# Altium PCB WDK-LED.PcbDoc
Units mil, origin at the board's own origin, x right, y up, seen from the top; angles counter-clockwise.
Board outline 1260 x 1260 mil, 2 copper layers (Top Layer, Bottom Layer); 26 components, 16 nets, 111 pads, 25 vias.
Unrouted connection lines stored in the file: 19.
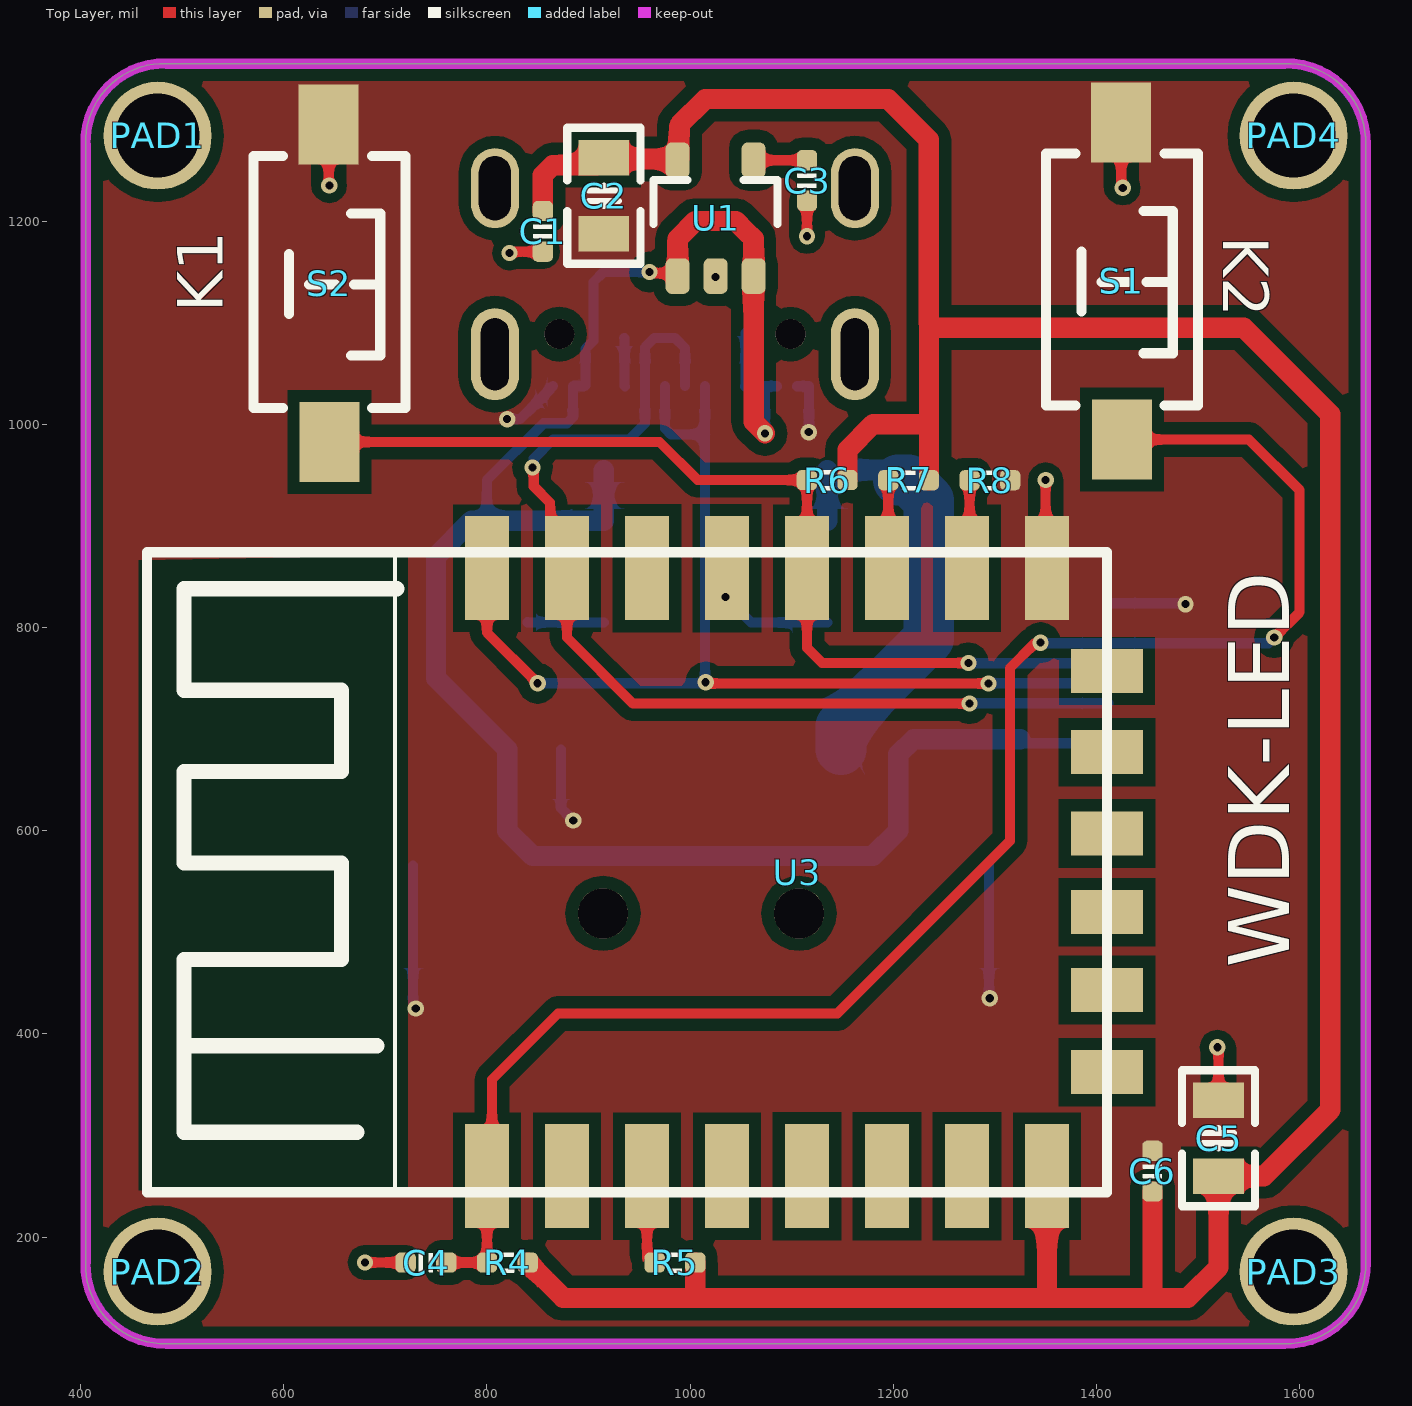
[diagram p0: Top Layer view]
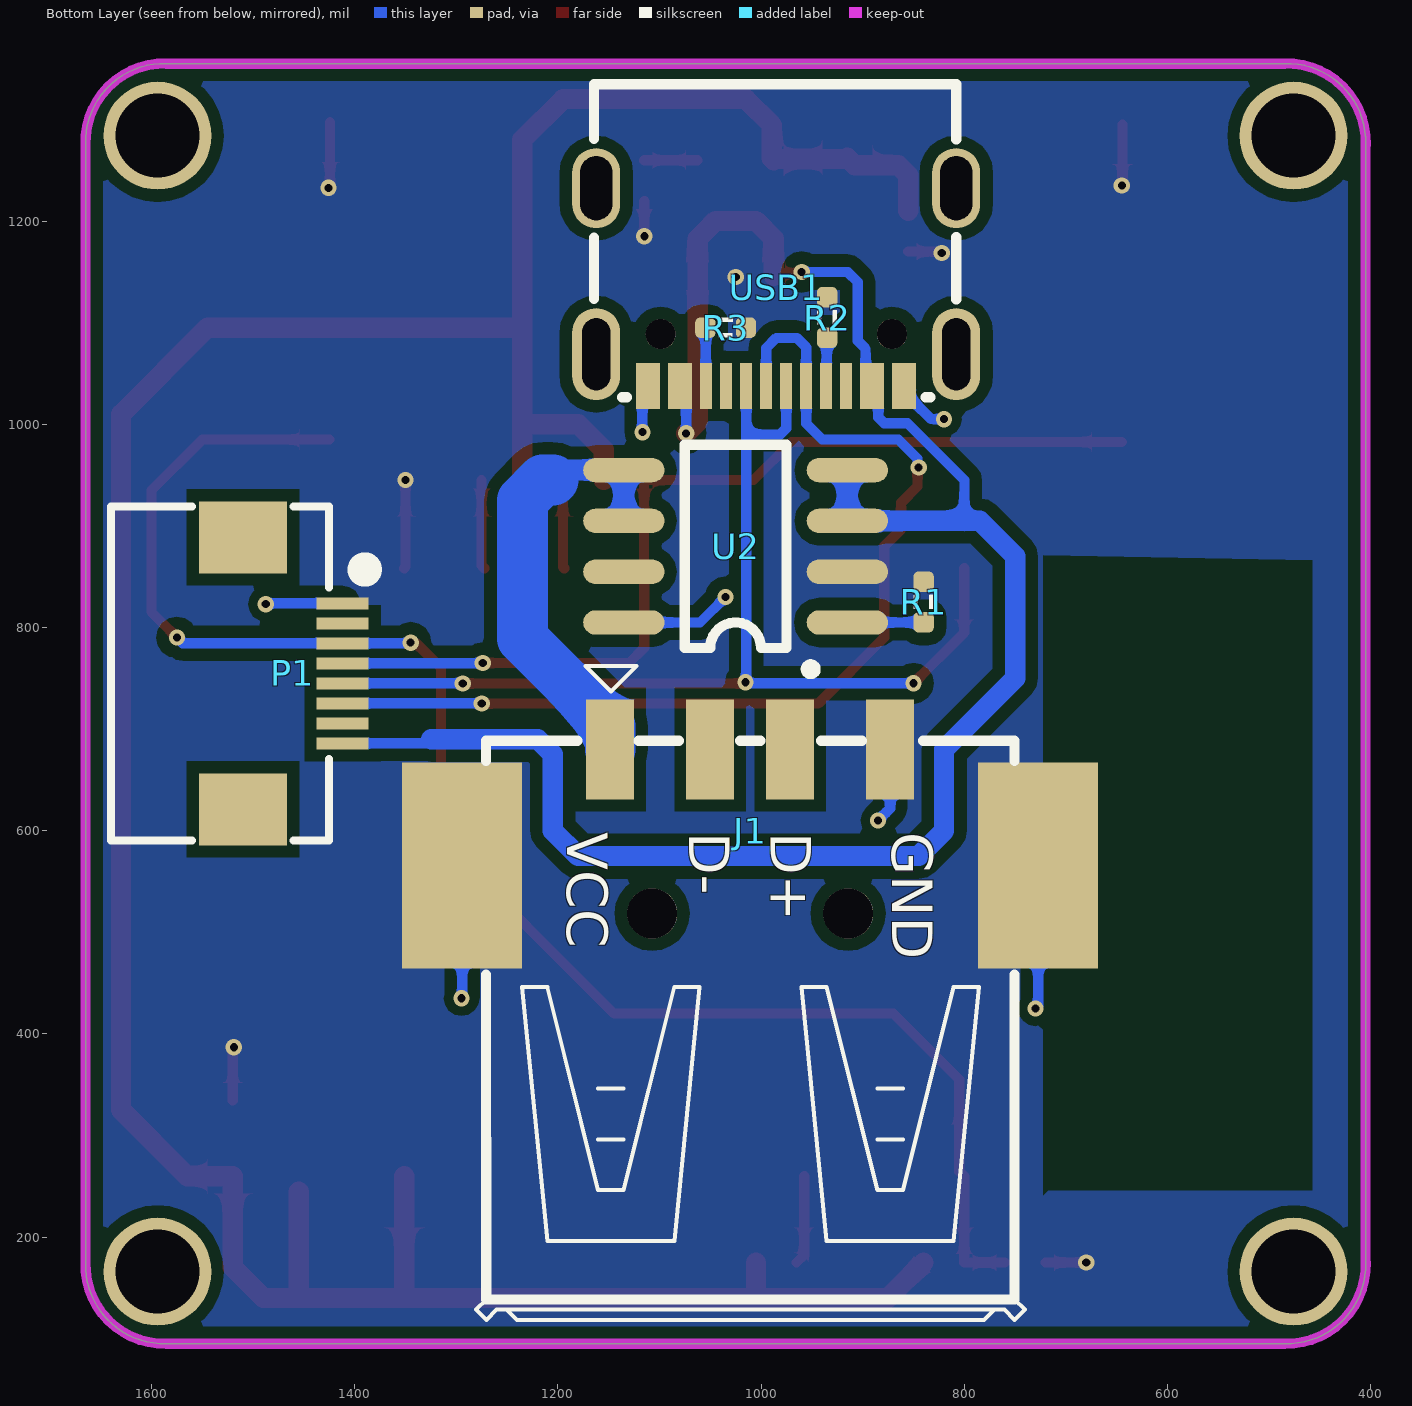
[diagram p1: Bottom Layer view, seen from below]
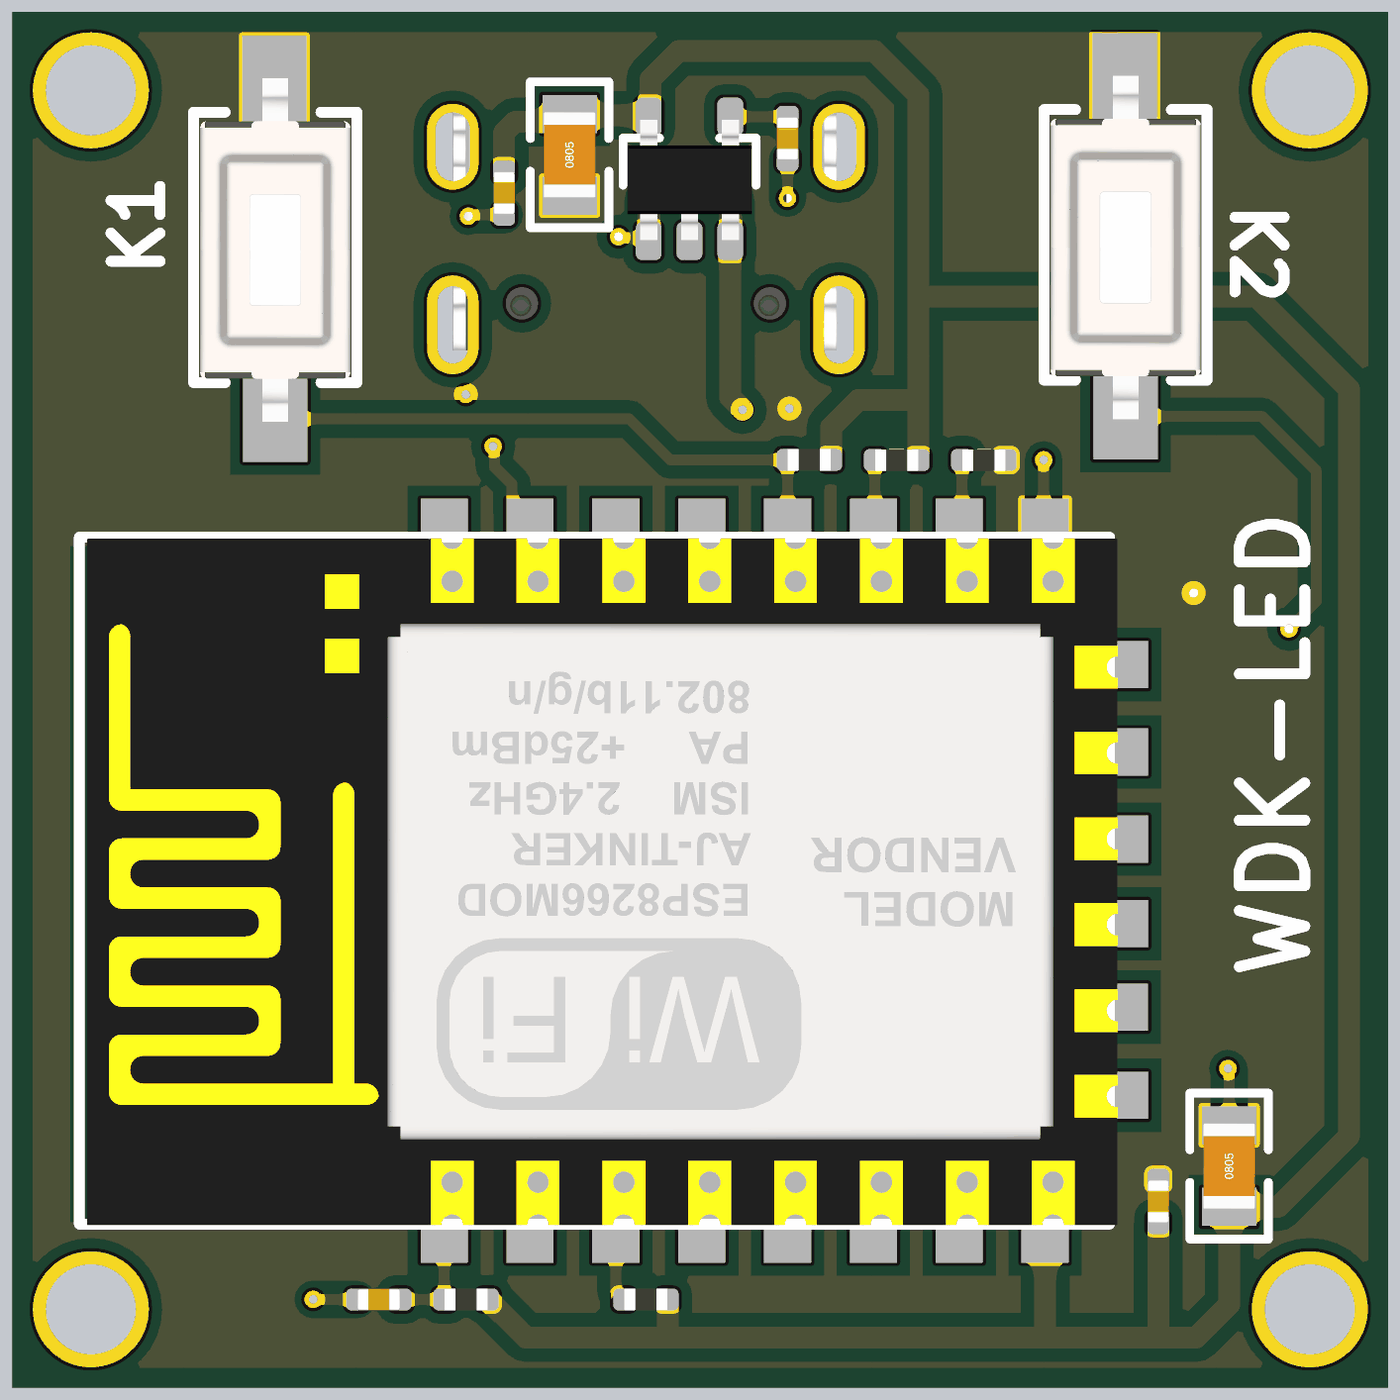
[diagram p2: 3D render of the assembled board from above, using the file's embedded part models]
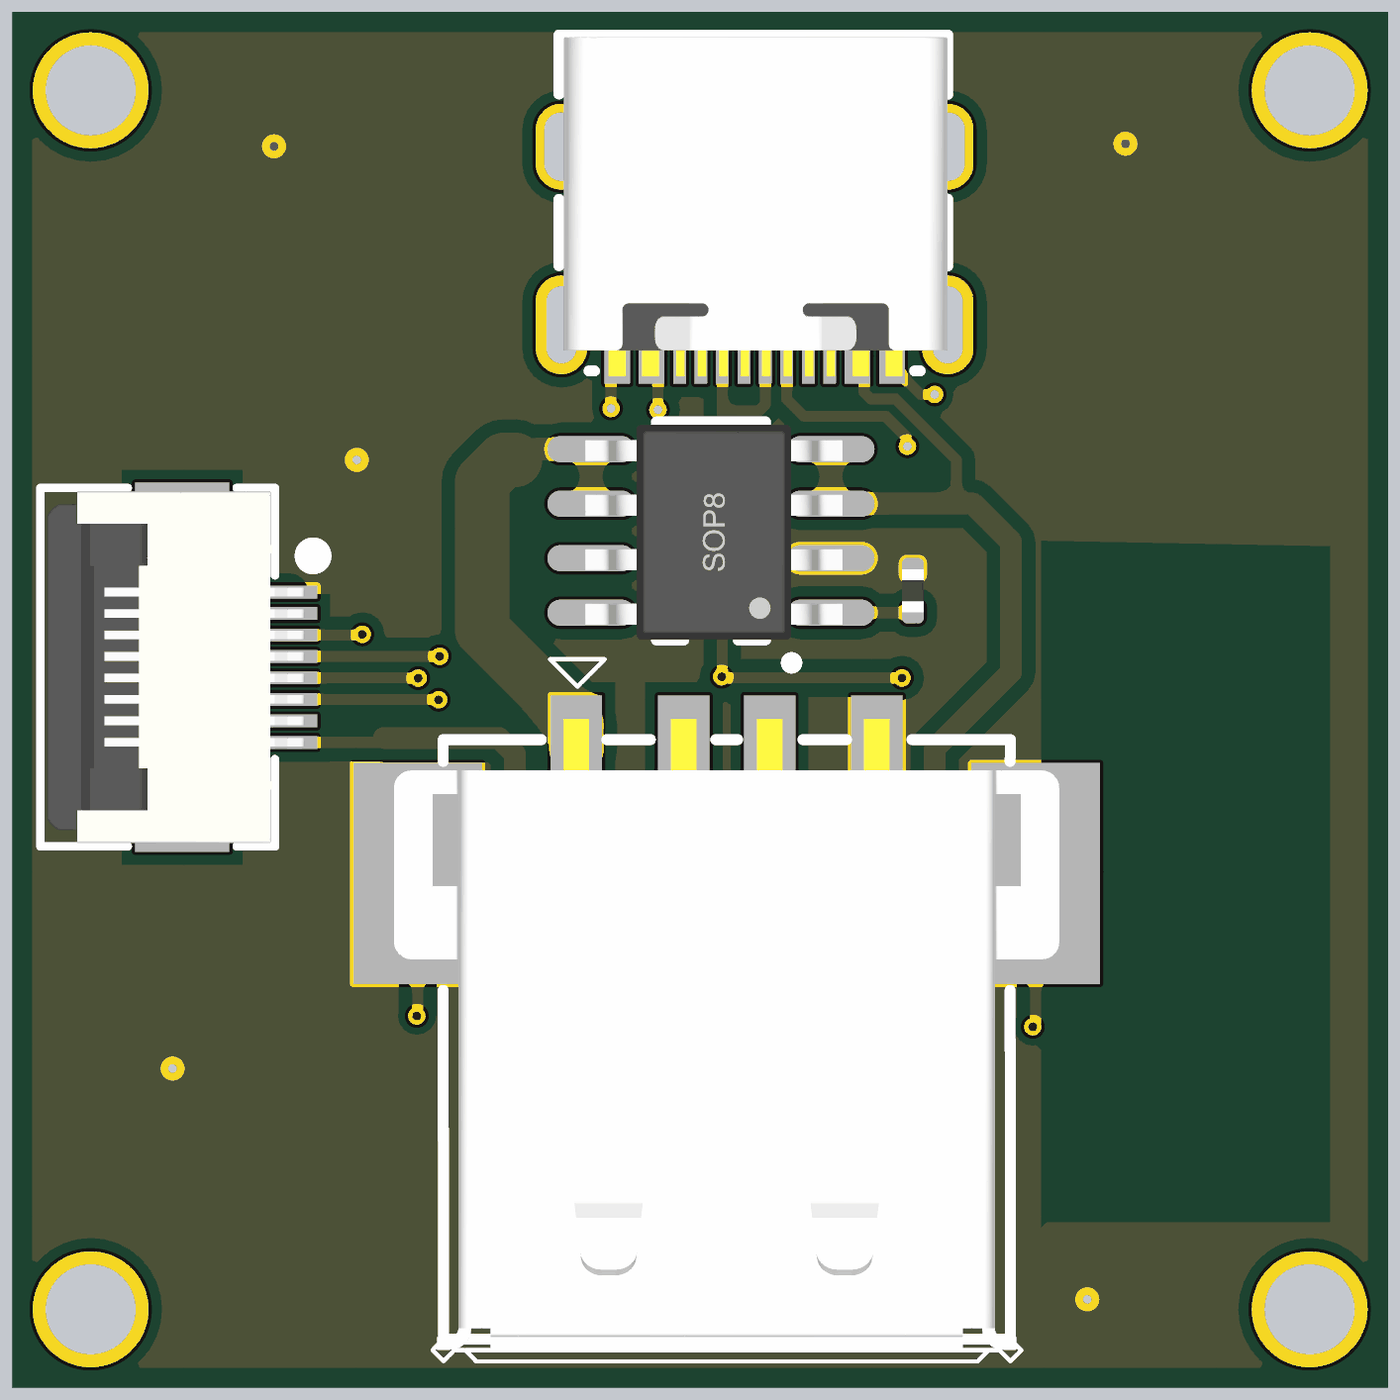
[diagram p3: 3D render of the assembled board from below, using the file's embedded part models]

## Layer stack, top to bottom
Top Solder: solder mask 0.4, Solder Resist, Dk 3.5
Top Layer: signal copper 1.4
Dielectric 1: dielectric 12.6, FR-4, Dk 4.8
Bottom Layer: signal copper 1.4
Bottom Solder: solder mask 0.4, Solder Resist, Dk 3.5

## Board outline
405,175 ccw(c482.5,172.5) 485,95 1585,95 ccw(c1587.5,172.5) 1665,175 1665,1275 ccw(c1587.5,1277.5) 1585,1355 1585,1354.84 485,1354.84 485,1355 ccw(c482.5,1277.5) 405,1275 405.16,1275

## Design rules (kind name [scope] priority, off if disabled: settings)
Clearance [All] p1: gap=6 ignorepadtopadclearanceinfootprint=FALSE
ComponentClearance [All] p1: gap=0 collisioncheckmode=3 verticalgap=0 showdistances=FALSE
DiffPairsRouting [All] p1: maxlimit=9 minlimit=9 mostfreqgap=9 toplayer_minwidth=4 toplayer_maxwidth=4 toplayer_prefwidth=4 bottomlayer_minwidth=4 bottomlayer_maxwidth=4 bottomlayer_prefwidth=4 maxuncoupledlength=500
FanoutControl Fanout_BGA [All] p1: bgadir=Out bgaviamode=Centered fanoutstyle=Auto fanoutdirection=Alternating viagrid=1 // Fanout_BGA (Default Rule)
HoleSize [All] p1: absolutevalues=TRUE maxlimit=10000 minlimit=8 maxpercent=80.000 minpercent=20.000
MinimumSolderMaskSliver [All] p1 off: minsoldermaskwidth=2
PlaneClearance [All] p1: clearance=8
PlaneConnect [All] p1: planeconnectstyle=Direct reliefexpansion=20 reliefentries=4 reliefconductorwidth=10 reliefairgap=10
PolygonConnect [All] p1: connectstyle=Direct reliefconductorwidth=10 reliefentries=4 polygonreliefangle="90 Angle" airgapwidth=10
RoutingVias [All] p1: holewidth=8 width=16 viastyle="Through Hole" minholewidth=6 minwidth=12 maxholewidth=28 maxwidth=50
SilkToSilkClearance [All] p1: silktosilkclearance=0
SilkToSolderMaskClearance [IsPad] p1: minsilkscreentomaskgap=0 clearancetoexposedcopper=TRUE
SolderMaskExpansion [All] p1: expansion=3 istentingtop=FALSE
Width [All] p1: maxlimit=10000 minlimit=4 preferedwidth=10
21 further rules are at their usual default settings.

## Classes and differential pairs
net class GND: GND
net class POWER: 3V3 5V

## Components (designator, comment, footprint, x,y, rotation, side; value= is the part's Value field where it differs from the comment)
C1 "0.1uF" CAP_0402 855.16,1189.84 r90 top value=0.1u
C2 "10uF" C0805_L 915.16,1224.84 r90 top value=0.1u
C3 "10nF" CAP_0402 1115.16,1239.84 r90 top value=0.1u
C4 "104" CAP_0402 740.16,174.84 r0 top
C5 "10uF" C0805_L 1520.15,297.25 r90 top
C6 "100nF" CAP_0402 1455.16,264.84 r90 top
J1 "USB-A" USB-A/S_C 1010.79,518.43 r180 bottom locked
P1 "DowmLoad" "FPC0.5 2H-WS-8P" 1510.16,754.84 r270 bottom
PAD1 "PAD" M2#1 475.16,1279.84 r90 top
PAD2 "PAD" M2#2 475.16,164.84 r90 top
PAD3 "PAD" M2#3 1595.16,174.84 r90 top
PAD4 "PAD" M2#4 1590.16,1284.84 r90 top
R1 "2K" RES_0402 840,825 r270 bottom
R2 "5.1K" RES_0402 935,1105 r270 bottom value=22R
R3 "5.1K" RES_0402 1035,1095 r0 bottom value=22R
R4 "10K" RES_0402 820.16,174.84 r0 top
R5 "10K" RES_0402 985.16,174.84 r180 top
R6 "10K" RES_0402 1135,945 r0 top
R7 "10K" RES_0402 1215.16,944.84 r0 top
R8 "10K" RES_0402 1295.16,944.84 r180 top
S1 "SW-PB" "SW SMD-3*6*2.5" 1425.16,1139.84 r270 top
S2 "SW-PB" "SW SMD-3*6*2.5" 645.16,1137.53 r270 top
U1 "LP2992 3V3" SOT23-5 1025.16,1204.84 r90 top
U2 "cn5711" SOP8 916.16,803.84 r0 bottom locked
U3 "ESP-12F" ESP-12F 1060.16,394.84 r90 top locked
USB1 "Type-C" USB-C-SMD_16P 985.16,1134.84 r180 bottom locked

## Footprints (in the part's own frame and the unit in brackets; to place one, negate y for a bottom-side part, rotate by r counter-clockwise, add the part's x,y. Pads: shape width x height; smd on the part's side, far side on the other; paste and mask are expansions set on the pad)
C0805_L [mil] "无极性贴片电容"
  rect 35x50 smd: 1(-37.4,0) 2(37.4,0)
  silkscreen extent -67,-36 67,36, body extent -39,-24 39,24, height 22
CAP_0402 [mil]
  rrect50% 20x20 smd: 1(-20,0) 2(20,0)
  silkscreen extent -7,-9 7,9, body extent -20,-10 20,10, height 20
ESP-12F [mm]
  rect 2.6x1.1 smd: 1(-3.429,6.604) 2(-3.429,4.604) 3(-3.429,2.604) 4(-3.429,0.604) 5(-3.429,-1.396) 6(-3.429,-3.396) 7(-3.429,-5.396) 8(-3.429,-7.396) 15(11.771,-7.396) 16(11.771,-5.396) 17(11.771,-3.396) 18(11.771,-1.396) 19(11.771,0.604) 20(11.771,2.604) 21(11.771,4.604) 22(11.771,6.604)
  rect 1.1x1.8 smd: 9(-0.829,-8.896) 10(1.225,-8.893) 11(3.171,-8.896) 12(5.14,-8.896) 13(7.171,-8.896) 14(9.204,-8.896)
  silkscreen extent -3.83,-8.9 12.17,15.1, body extent -3.86,-9.09 12.15,14.92, height 2.65
"FPC0.5 2H-WS-8P" [mm] "长：8.2mm，宽：5.2mm，高：2mm 淘宝ID:黄晶宝石   店铺网址:https://shop463601444.taobao.com"
  rect 1.8x2.2 smd: 0(-3.4,0) 0(3.4,0)
  rect 0.3x1.3 smd: 1(-1.75,2.497) 2(-1.25,2.497) 3(-0.75,2.497) 4(-0.25,2.497) 5(0.25,2.497) 6(0.75,2.497) 7(1.25,2.497) 8(1.75,2.497)
  silkscreen extent -4.17,-3.3 4.17,3.23, body extent -4.1,-3.15 4.1,2.85, height 2
M2#1 [mm]
  round 2.7 hole 2.1: 1(0.105,-0.022)
M2#2 [mm]
  round 2.7 hole 2.1: 1(0.026,-0.022)
M2#3 [mm]
  round 2.7 hole 2.1: 1(-0.228,0.026)
M2#4 [mm]
  round 2.7 hole 2.1: 1(-0.022,-0.101)
RES_0402 [mil]
  rrect50% 20x20 smd: 1(-20,0) 2(20,0)
  silkscreen extent -7,-10 7,10, body extent -20,-10 20,10, height 14
SOP8 [mil]
  oval 80x24 smd: 1(-1,-1) 2(-1,-51) 3(-1,-101) 4(-1,-151) 5(219,-151) 6(219,-101) 7(219,-51) 8(219,-1)
  silkscreen extent 30,-176 159,50, body extent -12,-173 225,24, height 75
SOT23-5 [mm]
  rrect50% 0.889x0.6 smd: 1(-1.5,0.95) 2(-1.5,0) 3(-1.5,-0.95) 4(1.396,-0.95) 5(1.396,0.95)
  silkscreen extent -0.2,-1.55 0.9,1.55, body extent -1.48,-1.45 1.32,1.45, height 1.2
"SW SMD-3*6*2.5" [mm] "3*6*2.5mm"
  rect 2x1.5 smd: 1(-3.996,-0.02) 2(3.937,0)
  silkscreen extent -3.21,-1.9 3.09,1.9, body extent -4,-1.75 4,1.75, height 2.59
USB-A/S_C [mm] "A型贴片母头， 淘宝ID:黄晶宝石"
  rect 1.2x2.5 smd: 1(-3.5,4.1) 2(-1,4.1) 3(1,4.1) 4(3.5,4.1)
  rect 3x5.15 smd: 4(-7.2,1.2) 4(7.2,1.2)
  round 1.25 hole 1.25 unplated: 7(-2.45,0) 8(2.45,0)
  silkscreen extent -6.85,-10.17 6.86,6.19, body extent -7.75,-9.9 7.75,4.8, height 7.4
USB-C-SMD_16P [mm] "封装库来自淘宝ID:黄晶宝石"
  oval 1.2x2.3 hole 0.7 slot 1.8 at 90 deg: 0(-4.5,-1.675) 0(4.5,-1.675)
  oval 1.2x2 hole 0.8 slot 1.6 at 90 deg: 0(-4.5,2.475) 0(4.5,2.475)
  rect 0.3x1.15 smd: A1(3.35,-2.473) A4(2.55,-2.471) A5(1.25,-2.475) A6(0.25,-2.475) A7(-0.25,-2.473) A9(-2.55,-2.475) A12(-3.35,-2.475) B1(-3.05,-2.475) B4(-2.25,-2.475) B5(-1.75,-2.475) B6(-0.75,-2.475) B7(0.75,-2.473) B9(2.25,-2.471) B12(3.05,-2.473)
  rect 0.3x1.148 smd: A8(1.75,-2.475) B8(-1.25,-2.475)
  round 0.75 hole 0.75 unplated: ""(-2.89,-1.175) ""(2.89,-1.175)
  silkscreen extent -4.56,-2.75 4.5,5.08, body extent -4.44,-2.87 4.5,5.03, height 3.25

## Part data
C1 C2 C3: library part 电容-0402, "Capacitor"
C4 C5 C6: library part C, "无极性贴片电容", BOM名称=无极性贴片电容, 学习资源=www.ooocke.com, 版权归属=源创客
J1: library part USB, "USB接口"
P1: library part "Header 8", "Header, 8-Pin", LatestRevisionDate=17-Jul-2002, LatestRevisionNote="Re-released for DXP Platform.", Publisher="Altium Limited"
PAD1 PAD2 PAD3 PAD4: "M2通孔"
R1 R4 R5 R6 R7 R8: library part R, "贴片电阻", BOM名称=贴片电阻, 学习资源=www.ooocke.com, 版权归属=源创客
R2 R3: library part 电阻-0402, "Resistor"
S1 S2: "微动开关", LatestRevisionDate=17-Jul-2002, LatestRevisionNote="Re-released for DXP Platform.", PackageReference=SPST-2, Published=24-Mar-1999, Publisher="Altium Limited"
U1: library part LP2992, "LDO"
U3: Manufacturer=安信可, Price=12.27
USB1: library part USB-Type-C-TOP

## Via types
v1: diameter 16, hole 8, Top Layer to Bottom Layer, 25 vias

## Nets (pads, with @x,y where several pads share a name; then routed paths per layer and width w, separated by ;. In a path a pad name is that pad's centre, name@x,y a point inside that pad or via, vN(x,y) a via of type N, cw(c..) or ccw(c..) an arc to the next point about the centre after c; other vN are vias at no path point)
3V3: C1.2 C2.2 C5.1 C6.1 R4.2 R5.1 R6.2 R7.2 U1.5 U3.8 | length 3248.4
  Top Layer w20: R4.2 875,140 1010,140 ; C1.2 855.16,1244.84 855,1245 865,1255 907.92,1255 C2.2 916.39,1261.01 986.53,1261.01 U1.5 989.57,1261.6 989.57,1294.57 1015,1320 1195,1320 1235,1280 1235,1100 1235.16,1099.84 ; R5.1 1005.16,144.84 1010,140 ; R6.2 1155,975 1180,1000 1230,1000 ; R7.2 1235.16,1099.84 ; U3.8 1351.34,143.66 1355,140 ; C6.1 1455.16,140.16 1455,140 ; 1010,140 1355,140 ; 1235.16,1099.84 1240,1095 1545,1095 1630,1010 1630,325 1564.84,259.84 C5.1 1520.16,170.16 1490,140 1455,140 ; 1355,140 1455,140
5V: P1.8 U1.1 U1.3 U2.3 U2.4 USB1.A4 USB1.A9 USB1.B4 USB1.B9 | length 1992
  Top Layer w10: v1(960.13,1149.71) 961.28,1148.56 984.98,1148.56 U1.1
  Top Layer w20: U1.1 987.76,1182.76 1005,1200 1045,1200 1054.97,1190.03 1062.56,1182.44 U1.3 1062.56,1002.22 v1(1073.8,990.98)
  Bottom Layer w10: 800,904.84 800,945 856,1001 878.91,1001 884.76,1006.86 USB1.A4 USB1.B9 897.15,1038.14 897.15,1074.14 905,1082 905,1140 914.71,1149.71 v1(960.13,1149.71) ; v1(1073.8,990.98) 1073.8,1037.35 USB1.B4 USB1.A9 ; 1325,690 1329.06,685.94 P1.8
  Bottom Layer w20: U2.4 U2.3 800,904.84 784.84,904.84 750,870 750,750 820,680 820,600 845,575 1180,575 1205,600 1205,675 1220,690 1325,690
EN: C4.2 P1.3 R4.1 S1.2 U3.1 | length 1623.3
  Top Layer w10: C4.2 R4.1 U3.1 805,264.69 805,355 870,420 1145,420 1315,590 1315,760 1338.85,783.85 1343.85,783.85 v1(1345,785) ; S1.2 1550.16,984.84 1600,935 1600,815 v1(1575,790)
  Bottom Layer w10: v1(1345,785) 1345.63,784.37 P1.3 1569.37,784.37 v1(1575,790)
GND: C1.1 C2.1 C3.1 C4.1 C5.2 C6.2 J1.4 P1.1 R1.1 R2.1 R3.1 R8.1 S1.1 S2.1 U1.2 U2.2 U3.15 USB1.A1 USB1.A12 USB1.B1 USB1.B12 | length 913.9
  Top Layer w10: S2.1 644.37,1235.63 v1(645,1235) ; v1(680,175) 680.16,174.84 C4.1 ; v1(822.29,1168.47) 823.66,1169.84 C1.1 ; v1(1025,1145) 1025.16,1145.16 U1.2 ; v1(1115,1185) 1115.08,1185.08 1115.08,1219.76 C3.1 ; v1(1350,945) 1350,859.61 U3.15 ; S1.1 1424.37,1234.16 v1(1425.92,1232.61) ; v1(1519.01,386.72) 1520.16,385.56 C5.2
  Bottom Layer w10: J1.4@727.32,565.67 727.32,427.68 v1(730,425) ; v1(820,1005) 832.61,1005 USB1.B12 ; J1.4@872.99,679.84 872.99,622.01 v1(885,610) ; USB1.B1 USB1.A12 1117.05,992.39 v1(1116.82,992.16) ; J1.4@1294.25,565.67 1294.25,435.75 v1(1295,435) ; P1.1 1486.75,823.74 v1(1487.57,822.91)
GPIO0: P1.4 R6.1 S2.2 U3.18 | length 953.6
  Top Layer w10: S2.2 970,982.53 1007.53,945 R6.1 1115.16,944.84 1115.16,858.31 U3.18 1115.12,779.88 1130,765 1270,765 1270.14,764.86 v1(1273.97,764.86)
  Bottom Layer w10: v1(1273.97,764.86) 1274.06,764.77 1411.76,764.77 P1.4
GPIO4: U2.8 U3.19 | length 110.6
  Bottom Layer w10: v1(1035,830) 1060.16,804.84 U2.8
LED+: J1.1 U2.5 U2.6 | length 419.2
  Bottom Layer w20: U2.6 U2.5 ; U2.5@1160.16,955.16 1210.16,955.16
  Bottom Layer w50: J1.1 1148.58,702.68 1235,789.09 1235,925 1215,945 1205,945
NetC3_2: C3.2 U1.4 | length 52.6
  Top Layer w10: U1.4@1062.59,1259.81 C3.2
NetR1_2: R1.2 U2.1 | length 75.2
  Bottom Layer w10: R1.2 840.08,804.92 915.08,804.92 U2.1
NetR2_2: R2.2 USB1.A5 | length 48
  Bottom Layer w10: R2.2 935.47,1084.53 935.47,1037.87 USB1.A5
NetR3_2: R3.2 USB1.B5 | length 53
  Bottom Layer w10: USB1.B5 1054.53,1037.88 1054.53,1089.53 R3.2@1055,1090
NetR5_2: R5.2 U3.3 | length 88.1
  Top Layer w10: U3.3 957.64,182.36 R5.2
NetR7_1: R7.1 U3.17 | length 87.1
  Top Layer w10: U3.17 1195.16,859.57 R7.1
NetR8_2: R8.2 U3.16 | length 87.6
  Top Layer w10: U3.16 1275.16,860.83 R8.2
RXD: P1.6 U3.21 USB1.A7 USB1.B7 | length 1034.4
  Top Layer w10: v1(845,957.5) 846.15,956.35 846.15,938.85 862.24,922.76 862.24,896.65 878.9,880 U3.21 878.9,790 943.9,725 v1(1275,725)
  Bottom Layer w10: v1(845,957.5) 846.15,958.65 846.15,966.15 865,985 940,985 955.63,1000.63 USB1.B7 955.63,1075.63 965,1085 985,1085 995,1075 USB1.A7 ; v1(1275,725) 1275.31,725.31 P1.6
TXD: P1.5 U3.22 USB1.A6 USB1.B6 | length 1070.7
  Top Layer w10: U3.22 800.16,794.84 v1(850,745) ; v1(1015.35,746.06) 1016.57,744.84 v1(1293.73,744.84)
  Bottom Layer w10: v1(850,745) v1@1015,745 ; USB1.A6 975.31,995.86 981.17,990 1014.69,990 ; v1@1014.69,746.06 1014.69,990 ; USB1.B6 1014.69,990 ; v1(1293.73,744.84) 1293.89,745 P1.5
pads on no net: J1.2 J1.3 J1.7 J1.8 P1.0 P1.2 P1.7 PAD1.1 PAD2.1 PAD3.1 PAD4.1 U2.7 U3.2 U3.4 U3.5 U3.6 U3.7 U3.9 U3.10 U3.11 U3.12 U3.13 U3.14 U3.20 USB1. USB1.0 USB1.A8 USB1.B8

## Polygon pours and split planes (outlines as drawn)
GND on Bottom Layer "GND_L02_P000" (solid, pour order 0): 405,1355 1665,1355 1665,95 405,95
GND on Top Layer "GND_L01_P001" (solid, pour order 1): 405,1355 1665,1355 1665,95 405,95

## Keep-outs
Keep-Out Layer:
  lines w10: 405,175 ccw(c482.5,172.5) 485,95 1585,95 ccw(c1587.5,172.5) 1665,175 1665,1275 ccw(c1587.5,1277.5) 1585,1355 ; 405,1275 cw(c482.5,1277.5) 485,1355 ; 405.16,175 405.16,1275 ; 485,1354.84 1585,1354.84

## Other copper
Multi-Layer:
  pour cut-out: 457.34,865.88 457.34,245.88 717.34,245.88 722.34,240.88 722.34,870.88

## Silkscreen, mask and mechanical layers (free items; w line width, h text height)
Top Overlay:
  text "K2" at 1525,1184.98 h45 r270
  text "K1" at 540,1110 h45 r90
  text "WDK-LED" at 1590,465 h60 r90
Bottom Overlay:
Mechanical 1:
  lines w10: 485,95 cw(c482.5,172.5) 405,175 405.16,1275 405,1275 cw(c482.5,1277.5) 485,1355 485,1354.84 1585,1354.84 1585,1355 cw(c1587.5,1277.5) 1665,1275 ; 485,95 1585,95 ; 485,95 485,95 ; 1585,95 ccw(c1587.5,172.5) 1665,175 ; 1585,95 1585,95 ; 1665,175 1665,1275 ; 1665,175 1665,175 ; 1665,1275 1665,1275
Drill Drawing:
  circle w10: c490.62,2507.28 r33.33
  lines w10: 457.29,1890.61 473.96,1890.61 473.96,1873.94 507.29,1873.94 507.29,1890.61 523.96,1890.61 523.96,1923.94 507.29,1923.94 507.29,1940.61 473.96,1940.61 473.96,1923.94 457.29,1923.94 457.29,1890.61 ; 457.29,2023.94 490.62,2040.61 523.96,2023.94 507.29,2057.28 523.96,2090.61 490.62,2073.94 457.29,2090.61 473.96,2057.28 457.29,2023.94 ; 457.29,2173.94 523.96,2173.94 523.96,2240.61 457.29,2240.61 457.29,2173.94 ; 457.29,2390.61 523.96,2390.61 490.62,2323.94 457.29,2390.61 ; 457.29,2640.61 473.96,2640.61 490.62,2623.94 507.29,2640.61 523.96,2640.61 507.29,2657.28 523.96,2673.94 507.29,2673.94 490.62,2690.61 473.96,2673.94 457.29,2673.94 473.96,2657.28 457.29,2640.61
  lines w15: 397.5,1828.94 13325.88,1828.94 ; 397.5,2728.94 13325.88,2728.94 ; 948.38,1678.94 948.38,2878.94 ; 1488.24,1678.94 1488.24,2878.94 ; 2587.92,1678.94 2587.92,2878.94 ; 3093.79,1678.94 3093.79,2878.94 ; 3827.59,1678.94 3827.59,2878.94 ; 5327.14,1678.94 5327.14,2878.94 ; 5916.99,1678.94 5916.99,2878.94 ; 6662.79,1678.94 6662.79,2878.94 ; 7312.62,1678.94 7312.62,2878.94 ; 8166.38,1678.94 8166.38,2878.94 ; 9499.99,1678.94 9499.99,2878.94 ; 10833.6,1678.94 10833.6,2878.94 ; 11923.28,1678.94 11923.28,2878.94 ; 397.5,1678.94 13325.88,1678.94 13325.88,2878.94 397.5,2878.94 397.5,1678.94
  text "Symbol" at 487.5,2773.94 h72
  text "Count" at 993.38,2773.94 h72
  text "Hole Size" at 1533.24,2773.94 h72
  text "Plated" at 2632.92,2773.94 h72
  text "Hole Type" at 3138.79,2773.94 h72
  text "Drill Layer Pair" at 3872.59,2773.94 h72
  text "Via/Pad" at 5372.14,2773.94 h72
  text "Pad Shape" at 5961.99,2773.94 h72
  text "Template" at 6707.79,2773.94 h72
  text "Description" at 7357.62,2773.94 h72
  text "Hole Tolerance (+)" at 8211.38,2773.94 h72
  text "Hole Tolerance (-)" at 9544.99,2773.94 h72
  text "Hole Length" at 10878.6,2773.94 h72
  text "Routed Path Length" at 11968.28,2773.94 h72
  text "2" at 993.38,2623.94 h60
  text "27.56mil (0.700mm)" at 1533.24,2623.94 h60
  text "PTH" at 2632.92,2623.94 h60
  text "Slot" at 3138.79,2623.94 h60
  text "Top Layer - Bottom Layer" at 3872.59,2623.94 h60
  text "Pad" at 5372.14,2623.94 h60
  text "Rounded" at 5961.99,2623.94 h60
  text "(Mixed)" at 6707.79,2623.94 h60
  text "70.87mil (1.800mm)" at 10878.6,2623.94 h60
  text "43.31mil (1.100mm)" at 11968.28,2623.94 h60
  text "2" at 993.38,2473.94 h60
  text "29.53mil (0.750mm)" at 1533.24,2473.94 h60
  text "NPTH" at 2632.92,2473.94 h60
  text "Round" at 3138.79,2473.94 h60
  text "Top Layer - Bottom Layer" at 3872.59,2473.94 h60
  text "Pad" at 5372.14,2473.94 h60
  text "Rounded" at 5961.99,2473.94 h60
  text "c75hn75" at 6707.79,2473.94 h60
  text "-" at 10878.6,2473.94 h60
  text "-" at 11968.28,2473.94 h60
  text "2" at 993.38,2323.94 h60
  text "31.50mil (0.800mm)" at 1533.24,2323.94 h60
  text "PTH" at 2632.92,2323.94 h60
  text "Slot" at 3138.79,2323.94 h60
  text "Top Layer - Bottom Layer" at 3872.59,2323.94 h60
  text "Pad" at 5372.14,2323.94 h60
  text "Rounded" at 5961.99,2323.94 h60
  text "(Mixed)" at 6707.79,2323.94 h60
  text "62.99mil (1.600mm)" at 10878.6,2323.94 h60
  text "31.50mil (0.800mm)" at 11968.28,2323.94 h60
  text "2" at 993.38,2173.94 h60
  text "49.21mil (1.250mm)" at 1533.24,2173.94 h60
  text "NPTH" at 2632.92,2173.94 h60
  text "Round" at 3138.79,2173.94 h60
  text "Top Layer - Bottom Layer" at 3872.59,2173.94 h60
  text "Pad" at 5372.14,2173.94 h60
  text "Rounded" at 5961.99,2173.94 h60
  text "c125hn125" at 6707.79,2173.94 h60
  text "-" at 10878.6,2173.94 h60
  text "-" at 11968.28,2173.94 h60
  text "4" at 993.38,2023.94 h60
  text "82.68mil (2.100mm)" at 1533.24,2023.94 h60
  text "PTH" at 2632.92,2023.94 h60
  text "Round" at 3138.79,2023.94 h60
  text "Top Layer - Bottom Layer" at 3872.59,2023.94 h60
  text "Pad" at 5372.14,2023.94 h60
  text "Rounded" at 5961.99,2023.94 h60
  text "c270h210" at 6707.79,2023.94 h60
  text "-" at 10878.6,2023.94 h60
  text "-" at 11968.28,2023.94 h60
  text "25" at 993.38,1873.94 h60
  text "8.00mil (0.203mm)" at 1533.24,1873.94 h60
  text "PTH" at 2632.92,1873.94 h60
  text "Round" at 3138.79,1873.94 h60
  text "Top Layer - Bottom Layer" at 3872.59,1873.94 h60
  text "Via" at 5372.14,1873.94 h60
  text "Rounded" at 5961.99,1873.94 h60
  text "v41h20" at 6707.79,1873.94 h60
  text "-" at 10878.6,1873.94 h60
  text "-" at 11968.28,1873.94 h60
  text "37 Total" at 993.38,1723.94 h60
  text "Slot definitions :" at 487.5,1578.97 h60
  text "Routed Path Length" at 1520.19,1578.97 h60
  text "= Calculated from tool start centre position to tool end centre position." at 2622.86,1578.97 h60
  text "Hole Length" at 1520.19,1478.99 h60
  text "= Routed Path Length + Tool Size = Slot length as defined in the PCB layout" at 2212.99,1478.99 h60

## Text inside footprints (layer, text, board x,y; h text height)
J1: Bottom Overlay "GND" at 870.79,598.43 h40 r90; Bottom Overlay "D+" at 990.79,598.43 h40 r90; Bottom Overlay "D-" at 1070.79,598.43 h40 r90; Bottom Overlay "VCC" at 1190.79,598.43 h40 r90